# Altium PCB Mini_STM32F405RGT6_V1.0.PcbDoc
Units mil, origin at the board's own origin, x right, y up, seen from the top; angles counter-clockwise.
Board outline 2415 x 1640 mil, 2 copper layers (Top Layer, Bottom Layer); 51 components, 67 nets, 240 pads, 168 vias.
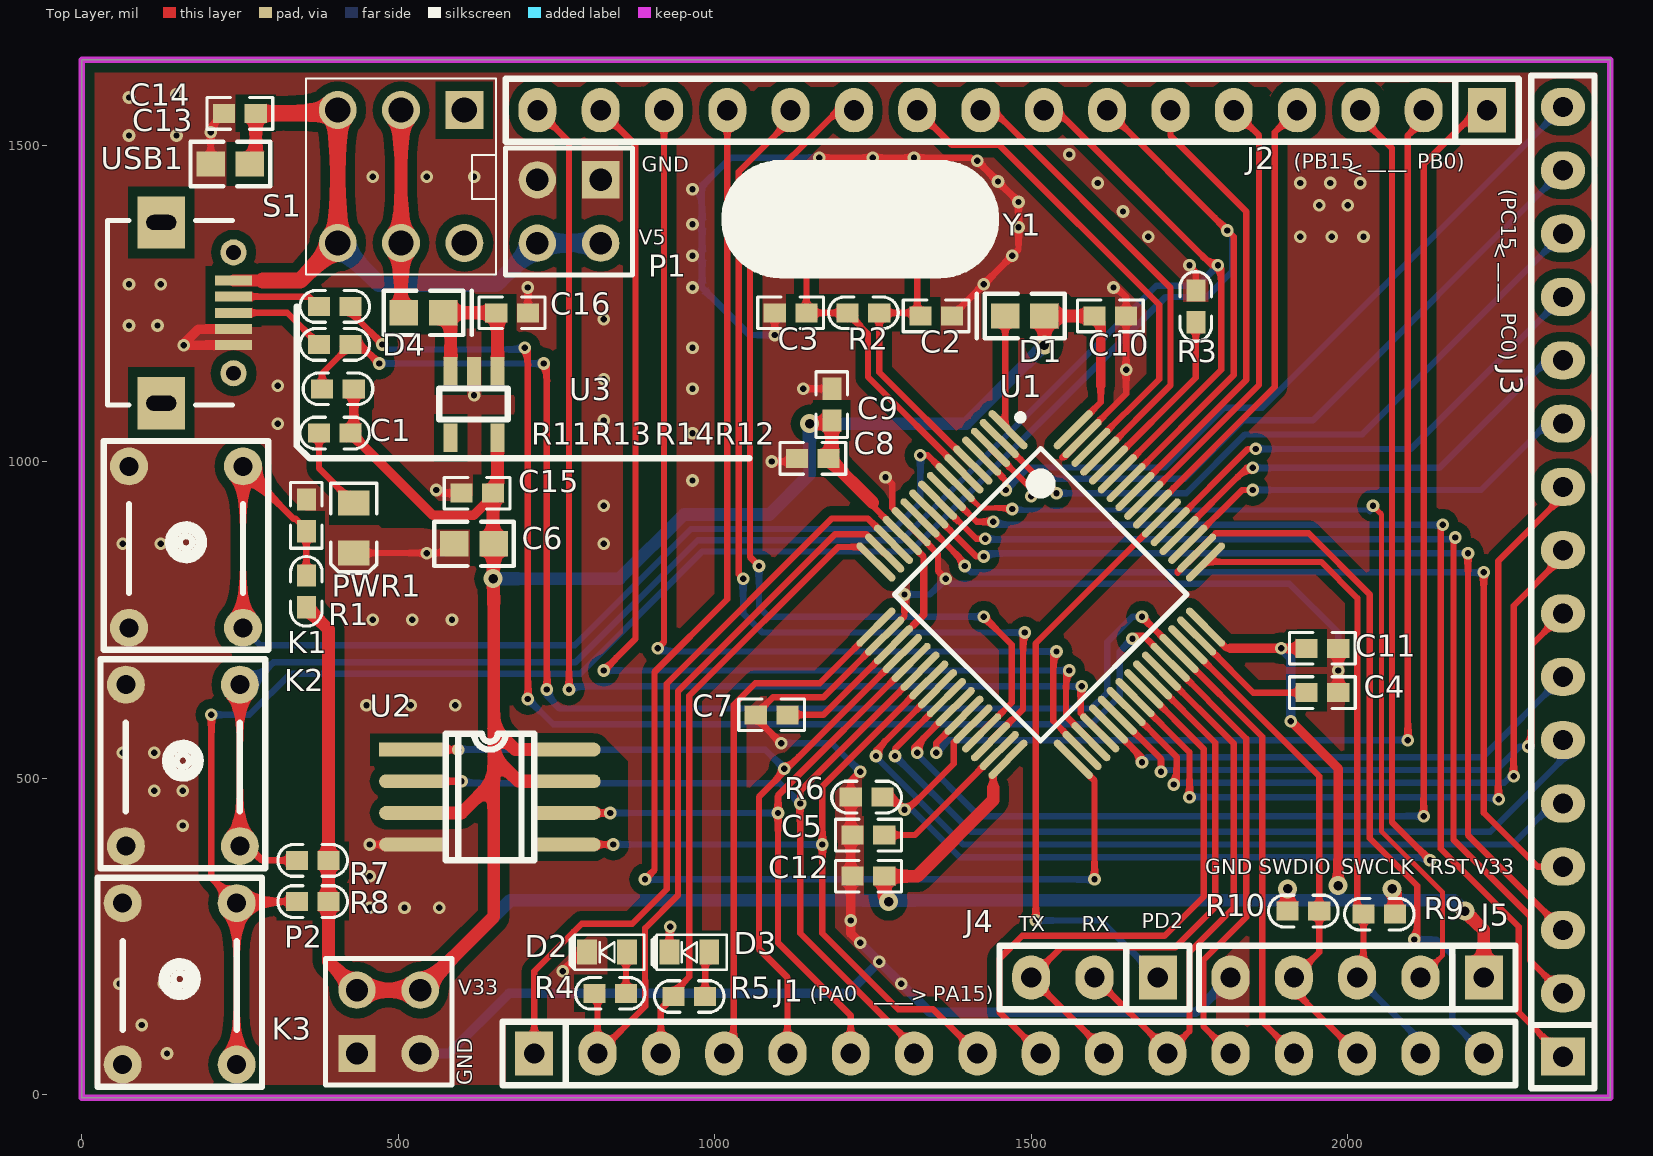
[diagram p0: Top Layer view]
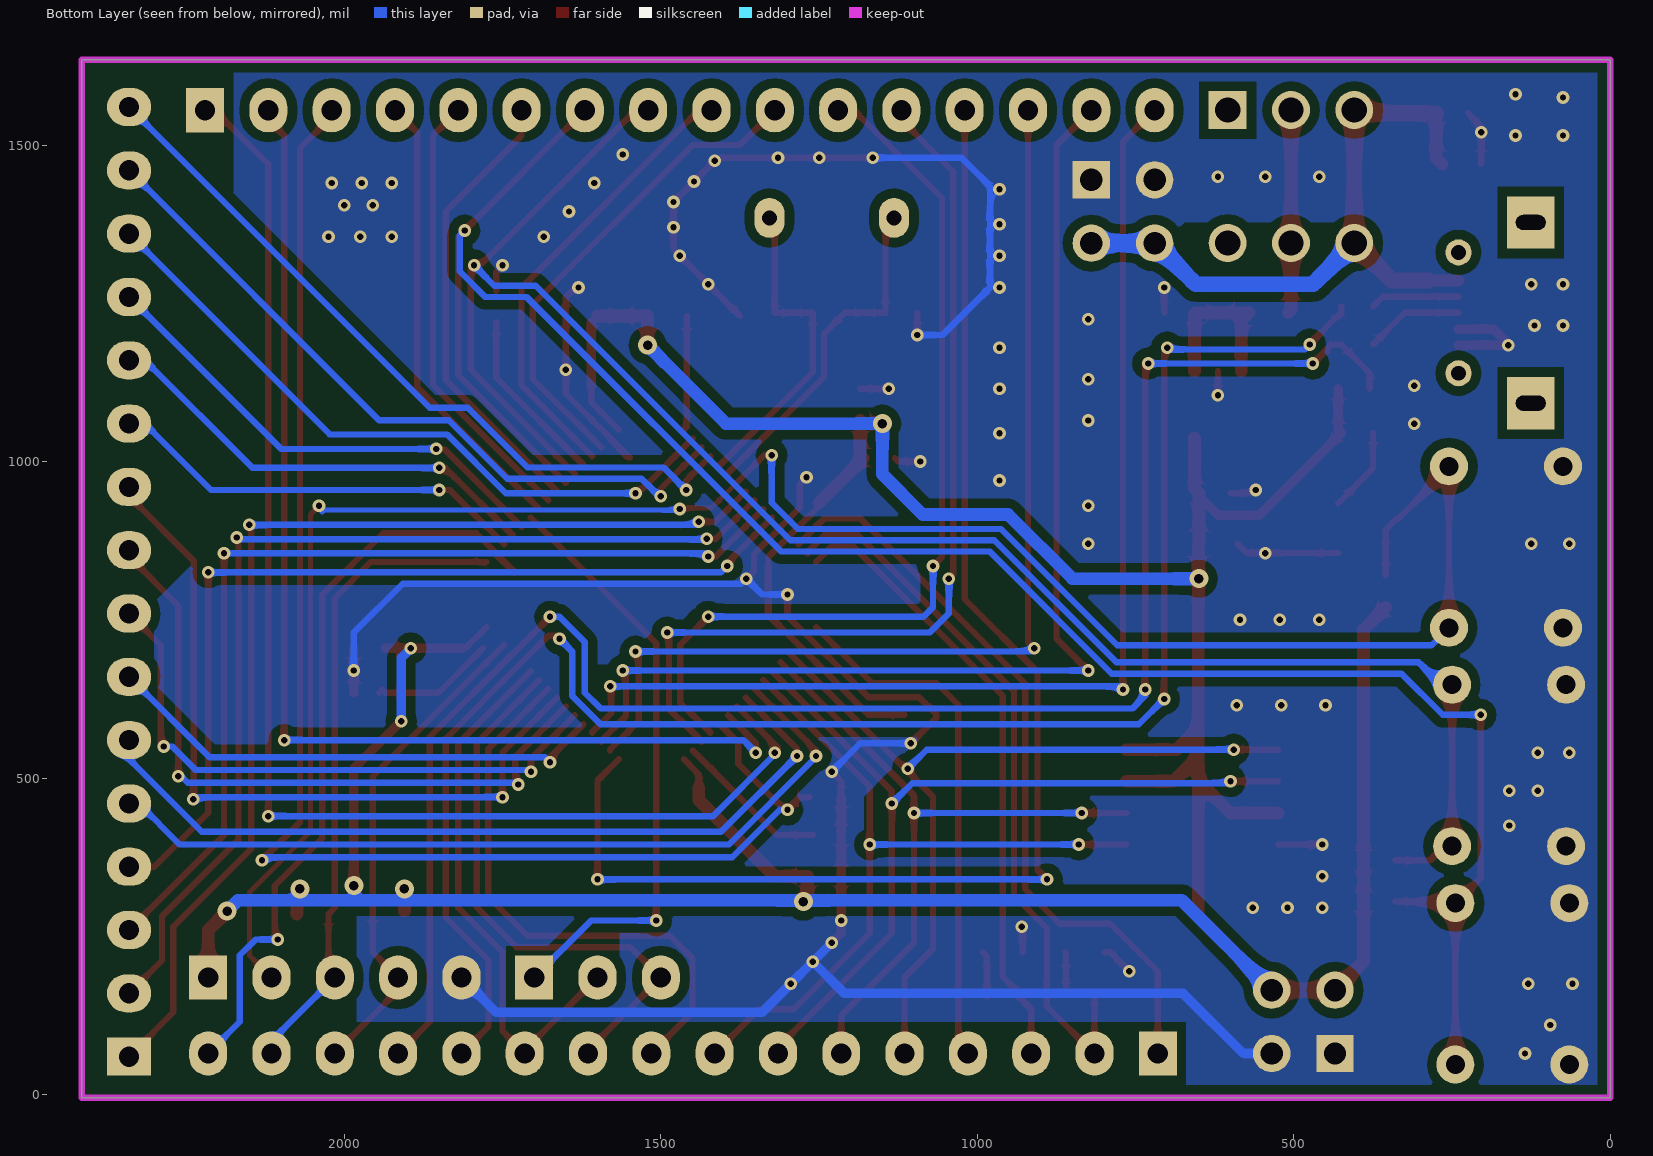
[diagram p1: Bottom Layer view, seen from below]
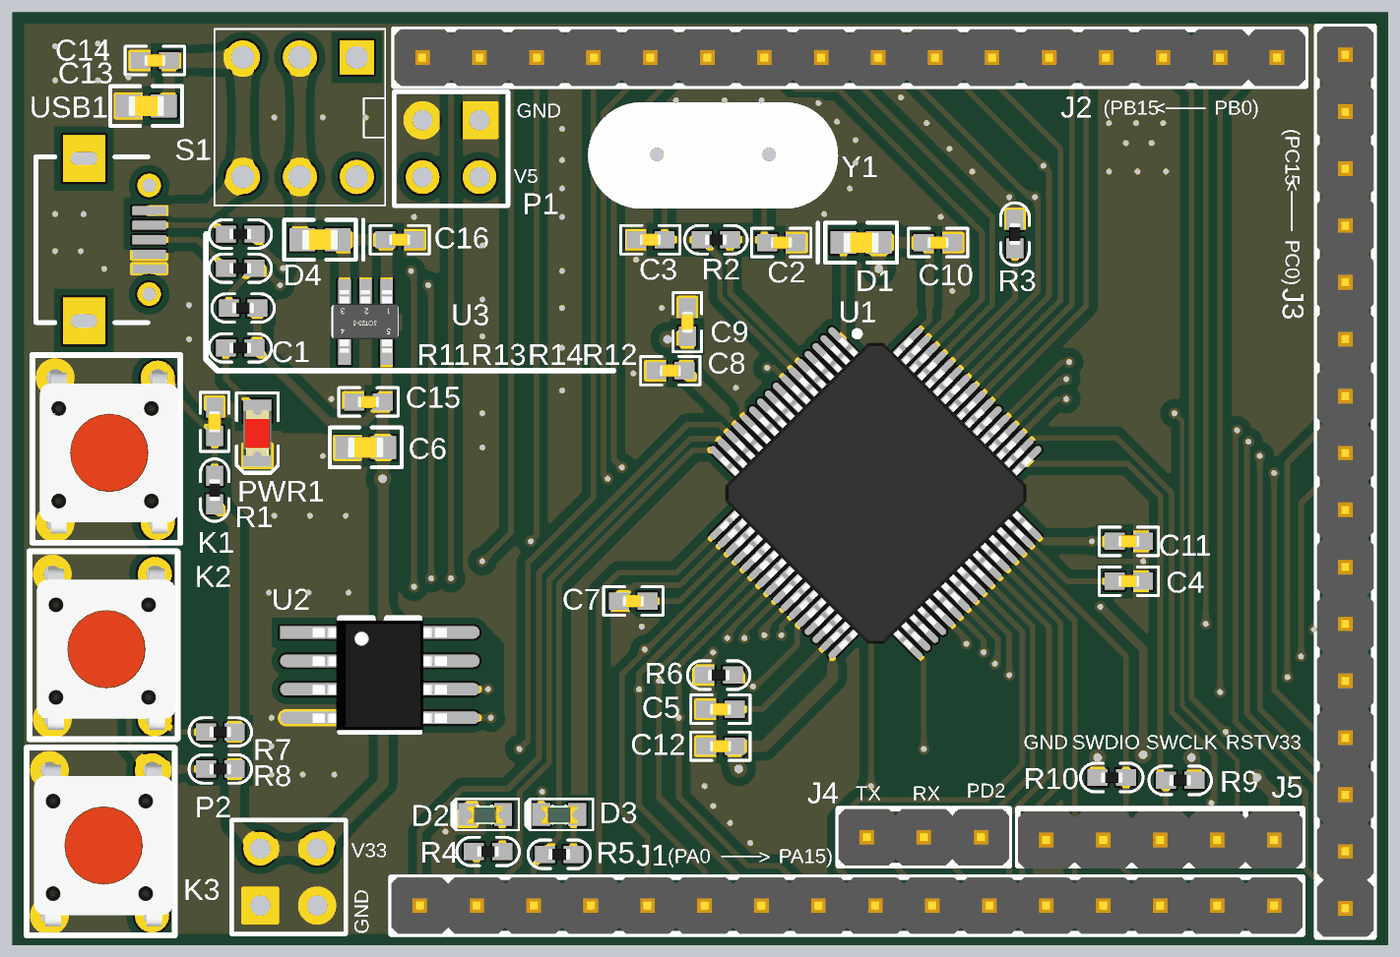
[diagram p2: 3D render of the assembled board from above, using the file's embedded part models]

## Layer stack, top to bottom
Top Layer: signal copper 1.4
Dielectric: dielectric 12.6, FR-4, Dk 4.8
Bottom Layer: signal copper 1.4

## Board outline
0,-5 0,1635 2415,1635 2415,-5

## Design rules (kind name [scope] priority, off if disabled: settings)
Clearance Clearance_1 [InPolygon] p1: gap=15
Clearance [All] p2: gap=7.87
PlaneConnect PlaneConnect_1 [IsPoly] p1: planeconnectstyle=Direct reliefexpansion=20 reliefentries=4 reliefconductorwidth=10 reliefairgap=10
PlaneConnect [All] p2: planeconnectstyle=Relief reliefexpansion=20 reliefentries=4 reliefconductorwidth=10 reliefairgap=10
PolygonConnect [All] p1: connectstyle=Direct reliefconductorwidth=10 reliefentries=4 polygonreliefangle="90 Angle"
RoutingVias [All] p1: holewidth=10 width=20 viastyle="Through Hole" minholewidth=8 minwidth=16 maxholewidth=28 maxwidth=50
SilkToSilkClearance [All] p1 off: silktosilkclearance=10
SilkscreenOverComponentPads SilkToSolderMaskClearance [IsPad] p1 off: minsilkscreentomaskgap=10
SolderMaskExpansion [All] p1: expansion=4
Width [All] p1: maxlimit=50 minlimit=7.87 preferedwidth=10
25 further rules are at their usual default settings.

## Components (designator, comment, footprint, x,y, rotation, side; value= is the part's Value field where it differs from the comment)
C1 "0.1uF" C0402 355,915 r0 top
C2 "18pF" C0402 1350,1230 r270 top
C3 "18pF" C0402 1120,1235 r90 top
C4 "2.2uF" C0402 1960,635 r90 top
C5 "2.2uF" C0402 1243,410 r90 top
C6 "4.7uF" C0603 620,870 r90 top
C7 "1uF" C0402 1090,600 r270 top
C8 "0.1uF" C0402 1155,1005 r270 top
C9 "0.1uF" C0402 1185,1090 r180 top
C10 "0.1uF" C0402 1625,1230 r90 top
C11 "0.1uF" C0402 1960,705 r90 top
C12 "0.1uF" C0402 1243,345 r270 top
C13 "4.7uF" C0603 235,1470 r90 top
C14 "1uF" C0402 250,1550 r270 top
C15 "1uF" C0402 625,950 r270 top
C16 "1uF" C0402 680,1235 r90 top
D1 "RB521" Diode-0603 1490,1230 r270 top
D2 "LED1" LED0603-green 830,225 r180 top
D3 "LED2" LED0603-green 960,225 r180 top
D4 "RB521S-30" Diode-0603 540,1235 r90 top
J1 "CON16" HEADER-16 715,65 r0 top
J2 "CON16" HEADER-16 2220,1555 r180 top
J3 "CON16" HEADER-16 2340,60 r90 top
J4 "CON3" HEADER-3 1600,185 r180 top
J5 "SWD" HEADER-5 2215,185 r180 top
K1 "SW-PB-1" SW-4PIN-DIP 165,865 r0 top
K2 "SW-PB-1" SW-4PIN-DIP 160,520 r0 top
K3 "SW-PB-1" SW-4PIN-DIP 155,175 r0 top
P1 "Header 2X2" HDR2X2 820,1445 r180 top
P2 "Header 2X2" HDR2X2 435,65 r0 top
PWR1 "RED" LED-0805-R 430,895 r270 top
R1 "10K" "R0402 -1" 355,795 r180 top
R2 "1M" "R0402 -1" 1235,1235 r270 top
R3 "10K" "R0402 -1" 1760,1245 r180 top
R4 "510R" "R0402 -1" 835,160 r90 top
R5 "510R" "R0402 -1" 960,155 r90 top
R6 "10K" "R0402 -1" 1240,470 r90 top
R7 "10K" "R0402 -1" 365,370 r90 top
R8 "10K" "R0402 -1" 365,305 r90 top
R9 "10K" "R0402 -1" 2050,285 r90 top
R10 "10K" "R0402 -1" 1930,290 r270 top
R11 "22R" "R0402 -1" 400,1245 r270 top
R12 "510R" "R0402 -1" 400,1045 r90 top
R13 "22R" "R0402 -1" 400,1185 r270 top
R14 "1.5K" "R0402 -1" 405,1115 r90 top
S1 "SWITCH" SWITCH_DDSZ 505,1450 r180 top
U1 "STM32F405RGT6" LQFP-64 1515,790 r315 top locked
U2 "W25Q64" SOIC-AB 645,470 r0 top
U3 "\"TC1185-3.3VCT\"/\"XC6228D332VR\"/\"WL2801E33-5/TR\"/\"SPX5205M5\"" SOT-23-5 620,1090 r270 top
USB1 "Micro usb" MICRO_USB_9 240,1235 r270 top
Y1 "XTAL" XTAL 1230,1385 r90 top

## Footprints (in the part's own frame and the unit in brackets; to place one, negate y for a bottom-side part, rotate by r counter-clockwise, add the part's x,y. Pads: shape width x height; smd on the part's side, far side on the other; paste and mask are expansions set on the pad)
C0402 [mil] "SMT电容"
  rect 30x35 smd: 1(0,-25) 2(0,25)
  silkscreen extent -25,-52 25,52, body extent -11,-20 11,20, height 20
C0603 [mil] "SMT电容"
  rect 40x45 smd: 1(0,31) 2(0,-31)
  silkscreen extent -35,-63 35,63, body extent -18,-32 18,31, height 31
Diode-0603 [mil]
  rect 40x45 smd: 1(0,31) 2(0,-31)
  silkscreen extent -35,-76 35,63, body extent -18,-32 18,31, height 31
HDR2X2 [mm] "Connector; Header; 2x2 Position"
  rect 1.5x1.5 hole 0.9: 1(0,0)
  round 1.5 hole 0.9: 2(0,2.54) 3(2.54,0) 4(2.54,2.54)
  silkscreen extent -1.27,-1.27 3.81,3.81
HEADER-3 [mil]
  rect 60x70 hole 32: 1(-100,0)
  oval 60x70 hole 32: 2(0,0) 3(100,0)
  silkscreen extent -150,-50 150,50, body extent -150,-50 150,50, height 398
HEADER-5 [mil]
  rect 60x70 hole 32: 1(0,0)
  oval 60x70 hole 32: 2(100,0) 3(200,0) 4(300,0) 5(400,0)
  silkscreen extent -50,-50 450,50, body extent -50,-45 450,55, height 398
HEADER-16 [mil]
  rect 60x70 hole 32: 1(0,0)
  oval 60x70 hole 32: 2(100,0) 3(200,0) 4(300,0) 5(400,0) 6(500,0) 7(600,0) 8(700,0) 9(800,0) 10(900,0) 11(1000,0) 12(1100,0) 13(1200,0) 14(1300,0) 15(1400,0) 16(1500,0)
  silkscreen extent -50,-50 1550,50, body extent -50,-50 1550,50, height 398
LED0603-green [mm]
  rect 0.8x1 smd: 1(-0.8,0) 2(0.8,0)
  silkscreen extent -1.5,-0.7 1.5,0.7, body extent -0.8,-0.38 0.8,0.42, height 0.6
LED-0805-R [mm]
  rect 1x1.25 smd: 1(-1,0)
  rect 1x1.25 smd mask+0.102: 2(1,0)
  silkscreen extent -1.8,-0.92 1.8,0.92, body extent -1.01,-0.62 1.01,0.63, height 1.1
LQFP-64 [mm] "LQFP64"
  oval 2.1x0.3 smd: 1(-5.6,3.75) 2(-5.6,3.25) 3(-5.6,2.75) 4(-5.6,2.25) 5(-5.6,1.75) 6(-5.6,1.25) 7(-5.6,0.75) 8(-5.6,0.25) 9(-5.6,-0.25) 10(-5.6,-0.75) 11(-5.6,-1.25) 12(-5.6,-1.75) 13(-5.6,-2.25) 14(-5.6,-2.75) 15(-5.6,-3.25) 16(-5.6,-3.75) 33(5.6,-3.75) 34(5.6,-3.25) 35(5.6,-2.75) 36(5.6,-2.25) 37(5.6,-1.75) 38(5.6,-1.25) 39(5.6,-0.75) 40(5.6,-0.25) 41(5.6,0.25) 42(5.6,0.75) 43(5.6,1.25) 44(5.6,1.75) 45(5.6,2.25) 46(5.6,2.75) 47(5.6,3.25) 48(5.6,3.75)
  oval 0.3x2.1 smd: 17(-3.75,-5.6) 18(-3.25,-5.6) 19(-2.75,-5.6) 20(-2.25,-5.6) 21(-1.75,-5.6) 22(-1.25,-5.6) 23(-0.75,-5.6) 24(-0.25,-5.6) 25(0.25,-5.6) 26(0.75,-5.6) 27(1.25,-5.6) 28(1.75,-5.6) 29(2.25,-5.6) 30(2.75,-5.6) 31(3.25,-5.6) 32(3.75,-5.6) 49(3.75,5.6) 50(3.25,5.6) 51(2.75,5.6) 52(2.25,5.6) 53(1.75,5.6) 54(1.25,5.6) 55(0.75,5.6) 56(0.25,5.6) 57(-0.25,5.6) 58(-0.75,5.6) 59(-1.25,5.6) 60(-1.75,5.6) 61(-2.25,5.6) 62(-2.75,5.6) 63(-3.25,5.6) 64(-3.75,5.6)
  silkscreen extent -5.72,-4.15 4.15,4.57, body extent -9.85,-9.88 9.91,9.88, height 1.6
MICRO_USB_9 [mm]
  rect 0.4x1.5 smd: 1(-1.3,0) 2(-0.65,0) 3(0,0) 4(0.65,0) 5(1.3,0)
  round 1.05 hole 0.6: 6(-2.425,0) 7(2.425,0)
  rect 2.1x1.9 hole 0.6 slot 1.2 at 90 deg: 8(-3.625,-2.9) 9(3.625,-2.9)
  silkscreen extent -3.7,-5.05 3.7,-0.05
"R0402 -1" [mil] "SMT电阻"
  rect 30x35 smd: 1(0,-25) 2(0,25)
  silkscreen extent -25,-55 25,55, body extent -10,-20 10,20, height 15
SOIC-AB [mil]
  rect 110x22 smd: 1(-120,75)
  oval 110x22 smd: 2(-120,25) 3(-120,-25) 4(-120,-75) 5(120,-75) 6(120,-25) 7(120,25) 8(120,75)
  silkscreen extent -70,-100 70,100, body extent -118,-97 118,96, height 61
SOT-23-5 [mil]
  rect 45x22 smd: 1(-52.5,37) 2(-52.5,0) 3(-52.5,-37) 4(52.5,-37) 5(52.5,37)
  silkscreen extent -26,-55 24,53, body extent -57,-57 54,57, height 43
SW-4PIN-DIP [mil]
  round 60 hole 30: 1(-90,-127.5) 1(-90,127.5) 2(90,-127.5) 2(90,127.5)
  silkscreen extent -130,-162 130,168, body extent -117,-160 127,151, height 191
SWITCH_DDSZ [mil] "SWITCH_DDSZ"
  rect 60x60 hole 40: 1(-99.65,-105.34)
  round 60 hole 40: 2(0.35,-105.34) 3(100.35,-105.34) 4(100.35,104.66) 5(0.35,104.66) 6(-99.65,104.66)
  silkscreen extent -150,-155 150,155
XTAL [mm] "10*4.5----5"
  oval 1.6x1.2 hole 0.6: 1(0,2.5) 2(0,-2.5)
  silkscreen extent -2.3,-5.46 2.2,5.46, body extent -2.3,-5.5 2.17,5.47, height 2.35

## Part data
C1 C2 C3 C4 C5 C6 C7 C8 C9 C10 C11 C12 C13: library part CAP, "SMT电容"
C14 C15 C16: library part 电容
D1: library part DIODE
D2 D3: library part LED0, "Typical INFRARED GaAs LED"
D4: library part "Diode 1N914", "二极管"
J1 J2 J3 J4: "Connector"
J5: library part CON5, "Connector"
K1 K2 K3: "轻触按键"
P1 P2: "Header, 2-Pin, Dual row"
PWR1: library part LED1
R1 R2 R3 R4 R5 R6 R7 R8 R9 R10 R11 R12 R13 R14: library part RES1, "SMT电阻"
U2: library part W25X40, "nor flash"
U3: library part S1132, "LDO"
USB1: library part "USB joggle"
Y1: "Crystal Oscillator"

## Via types
v1: diameter 20, hole 10, Top Layer to Bottom Layer, tented both sides, 160 vias
v2: diameter 30, hole 15, Top Layer to Bottom Layer, tented both sides, 8 vias

## Nets (pads, with @x,y where several pads share a name; then routed paths per layer and width w, separated by ;. In a path a pad name is that pad's centre, name@x,y a point inside that pad or via, vN(x,y) a via of type N, cw(c..) or ccw(c..) an arc to the next point about the centre after c; other vN are vias at no path point)
4: USB1.6
GND: C1.2 C2.2 C3.2 C4.1 C5.2 C6.1 C7.1 C8.1 C9.1 C10.1 C11.1 C12.1 C13.1 C14.1 C15.1 C16.1 D2.2 D3.2 J5.5 K1.1 K2.1 K3.1 P1.1 P1.3 P2.1 P2.3 PWR1.2 R3.1 R6.2 U1.12 U1.18 U1.63 U2.4 U3.2 USB1.4 USB1.5 | length 5634.6
  Top Layer w10: C13.1 204,1529 C14.1 ; PWR1.2 574.63,855.63 C6.1 ; v1(455,395) U2.4 ; v1(560,955) 565,950 C15.1 ; v1(620,1105) U3.2 ; C16.1 v1(705,1275) ; v1(760,195) 790,225 D2.2 ; D3.2 928.5,263.5 v1(930,265) ; v1(1090,1000) 1125,1000 C8.1 ; v1(1095,1200) C3.2 ; v1(1105,555) 1065,595 C7.1 1065,600.71 1092.17,627.87 1171.92,627.87 U1.18 1300,755.95 v1(1300,790) ; v1(1140,1115) C9.1 ; v1(1165,1480) 1405,1480 1410,1475 v1(1415,1475) v1(1480,1410) 1480,1335 C2.2 ; R6.2 1215,495 v1(1230,510) ; v1(1270,975) 1280.47,964.53 1280.47,927.09 U1.12 1310.38,895.9 1352.87,853.41 1352.87,827.13 v1(1365,815) ; U1.63 1580.42,1035.09 1551.79,1006.46 1549.23,1006.46 1650,1107.23 C10.1 1650,1260 1635,1275 v1(1630,1275) ; v1(1750,1310) 1760,1300 R3.1
  Top Layer w15: USB1.5 v1(161.18,1183.82) 160,1185 184.41,1209.41 USB1.4 ; R6.2 1215,255 v1(1230,240) ; C4.1 v1(1985,670) C11.1
  Bottom Layer w10: v1(1095,1200) 1055,1200 980,1275 980,1435 1025,1480 v1(1165,1480) ; v1(1105,555) 1185,555 v1(1230,510) ; v1(1300,790) 1340,790 v1(1365,815) 1372.87,807.13 1907.87,807.13 1985,730 v1(1985,670)
  Bottom Layer w15: P2.3 580,65 675,160 1210,160 v1(1260,210) ; v1(1230,240) v1(1260,210) ; J5.5 1760,130 1340,130 v1(1295,175) v1(1260,210)
  other v1: 135,65 95,110 60,175 130,175 1215,275 455,295 510,295 565,295 455,345 160,425 115,480 160,480 65,540 115,540 450,615 520,615 590,615 460,750 522.5,750 585,750 545,855 65,870 125,870 825,870 825,930 965,970 965,1045 310,1060 825,1065 965,1115 310,1120 825,1130 1650,1145 965,1180 75,1215 120,1215 825,1225 965,1275 75,1280 125,1280 1425,1280 965,1325 1470,1325 1685,1355 1925,1355 1975,1355 2025,1355 1480,1370 965,1375 1645,1395 1955,1405 2000,1405 965,1430 1605,1440 1925,1440 1972.5,1440 2020,1440 1447.5,1442.5 460,1450 545,1450 620,1450 1250,1480 1315,1480 1560,1485 75,1515 150,1515 204,1520 75,1575 150,1580
KEY1: J2.8 K2.2 R7.2 U1.59 | length 2979.7
  Top Layer w10: K2.2@250,392.5 K2.2@250,405 ; K2.2@250,647.5 K2.2@250,405 ; R7.2 285,370 K2.2@250,405 ; J2.8 1540,1555 1785,1310 v1(1795,1310) 1800.37,1304.63 1800.37,1144.97 U1.59
  Bottom Layer w10: K2.2@250,647.5 267.5,630 267.5,647.5 302.87,682.87 780.25,682.87 973.12,875.75 1295.75,875.75 1697.87,1277.87 1762.87,1277.87 v1(1795,1310)
KEY2: J2.7 K3.2 R8.2 U1.58 | length 3377.4
  Top Layer w10: v1(205,600) 205,342.5 K3.2@245,302.5 ; K3.2@245,47.5 K3.2@245,302.5 ; R8.2 247.5,305 K3.2@245,302.5 ; J2.7 v1(1810,1365) 1820,1355 1820,1136.76 U1.58
  Bottom Layer w10: v1(205,600) 265,600 330,665 787.65,665 980.53,857.87 1310,857.87 1712.13,1260 1777.35,1260 1817.87,1300.53 1817.87,1357.13 v1(1810,1365)
LED1: J1.2 R4.2 U1.15 | length 1165.8
  Top Layer w10: R4.2 815,155 J1.2 815.71,65 890.37,139.67 890.37,180.33 890.12,180.59 890.12,262.99 942.13,315 942.13,637.4 1190.06,885.34 1239.99,885.34 1267.35,857.98 1267.35,855.42 U1.15
LED2: J1.3 R5.2 U1.16 | length 985.4
  Top Layer w10: J1.3 915,135 R5.2 935,161.08 960,186.08 960,630 1195,865 1231.21,865 U1.16
NetC2_1: C2.1 R2.2 U1.5 Y1.2 | length 514.6
  Top Layer w10: Y1.2 1320,1376.57 1320,1235 R2.2 1260,1141.16 U1.5@1406.54,994.62
NetC3_1: C3.1 R2.1 U1.6 Y1.1 | length 551
  Top Layer w10: Y1.1 1145,1371.57 C3.1 R2.1 1210,1234.29 1242.13,1202.17 1242.13,1133.75 1393.9,981.98 U1.6
NetC4_2: C4.2 U1.47 | length 190.1
  Top Layer w10: U1.47@1780.95,705 1850.95,635 C4.2 ; C4.2@1940,640 C4.2@1945,635
NetC5_1: C5.1 U1.31 | length 244.9
  Top Layer w10: C5.1@1260,410 1315.95,410 U1.31
NetC16_2: C16.2 D4.2 U3.1 U3.3 | length 274.8
  Top Layer w20: U3.3 583,1223 D4.2 C16.2 657,1233 U3.1
NetD1_2: D1.2 U1.1 | length 181.6
  Top Layer w10: D1.2 1459,1054.79 U1.1
NetD2_1: D2.1 R4.1 | length 65.6
  Top Layer w10: R4.1 860,223.5 D2.1
NetD3_1: D3.1 R5.1 | length 72.7
  Top Layer w10: R5.1 985,218.5 D3.1
NetD4_1: D4.1 S1.2 S1.5 | length 322.1
  Top Layer w20: S1.2 S1.5 504.65,1239.35 D4.1
NetPWR1_1: PWR1.1 R12.2 | length 133.4
  Top Layer w10: R12.2 375,989.37 PWR1.1
NetR3_2: R3.2 U1.60 | length 282.5
  Top Layer w10: U1.60 1760,1132.44 R3.2
NetR11_1: R11.1 USB1.2 | length 141.5
  Top Layer w10: USB1.2 359.41,1260.59 R11.1
NetR13_1: R13.1 USB1.3 | length 155.7
  Top Layer w10: USB1.3 325,1235 R13.1
PA0: J1.1 U1.14 | length 1201
  Top Layer w10: J1.1 715,195.14 777.42,257.56 777.56,257.56 790,270 870,270 924.25,324.25 924.25,649.25 1185,910 1241.89,910 U1.14
PA3: J1.4 U1.17 | length 832.5
  Top Layer w10: J1.4 1030,80 1030,615.71 1064.29,650 1166.21,650 U1.17
PA4: J1.5 U1.20 U2.1 | length 1341.6
  Top Layer w10: U2.1 v1(595,545) ; J1.5 1115,185 1070,230 1070,470.27 U1.20
  Bottom Layer w10: v1(595,545) 1080,545 v1(1110,515)
PA5: J1.6 U1.21 U2.6 | length 1087.6
  Top Layer w10: U2.6 v1(835,445) ; J1.6 1215,125 1100,240 1100,472.44 U1.21
  Bottom Layer w10: v1(835,445) v1(1100,445)
PA6: J1.7 U1.22 U2.2 | length 1368.1
  Top Layer w10: U2.2 v1(600,495) ; J1.7@1315,80 1310,80 1135,255 1135,479.6 U1.22
  Bottom Layer w10: v1@600,492.13 1102.87,492.13 v1(1135,460)
PA7: J1.8 U1.23 U2.5 | length 1198.4
  Top Layer w10: U2.5 v1(840,395) ; U1.23 1170,486.76 1170,255 1290,135 1345,135 J1.8
  Bottom Layer w10: v1(840,395) v1(1170,395)
PA8: J1.9 U1.41 | length 907.9
  Top Layer w10: J1.9 1450,130 1450,215 1485.75,250.75 1710.75,250.75 1772.87,312.87 1772.87,546.05 U1.41
PA9: J1.10 J4.3 U1.42 | length 909.5
  Top Layer w10: J1.10 1615,70 J4.3 1547.87,232.87 1727.87,232.87 1790.75,295.75 1790.75,556.01 U1.42
  Bottom Layer w10: J4.3@1500,180 J4.3
PA10: J1.11 J4.2 U1.43 | length 867.4
  Top Layer w10: J4.2 1715,70 J1.11 1750,100 1750,225 1820,295 1820,554.6 U1.43
  Bottom Layer w10: J1.11 J1.11@1715,70
PA11: J1.12 R11.2 U1.44 | length 2727.8
  Top Layer w10: R11.2 425,1235 425.71,1235 475,1185.71 v1(475,1185) ; v1(700,1180) 705,1175 v1(705,625) ; v1(1660,720) 1665,725 1677.44,725 U1.44 1840,562.44 1840,280 1772.13,212.13 1772.13,107.87 J1.12
  Bottom Layer w10: v1(475,1185) 482.87,1177.13 v1@700,1177.13 ; v1(705,625) 745,585 1595.28,585 1640,629.72 1640,700 v1(1660,720)
PA12: J1.13 R13.2 R14.2 U1.45 | length 2777.9
  Top Layer w10: R14.2 380,1139.29 425,1184.29 R13.2 440,1185 v1(470,1155) ; v1(730,1155) 735,1150 v1(735,640) ; v1(1675,755) 1733.26,696.74 U1.45 1865,565.27 1865,115 J1.13
  Bottom Layer w10: v1(470,1155) v1(730,1155) ; v1(735,640) 735,630 755,610 1595,610 1620,635 1620,715 1660,755 v1(1675,755)
PA13: J1.14 J5.4 R10.2 U1.46 | length 789.6
  Top Layer w10: U1.46 1955,503.11 R10.2 1955,225 J5.4 1915,165 J1.14
PA14: J1.15 J5.3 R9.2 U1.49 | length 1053.3
  Top Layer w10: U1.49 1958.22,841.5 2015.37,784.35 2015.37,684.67 2015,684.29 2015,655.71 2015.37,655.33 2015.37,614.67 2015,614.29 2015,295 R9.2 2025,195 J5.3 ; J1.15 J1.15@2115,85
  Bottom Layer w10: J5.3 2115,85 J1.15
PA15: J1.16 U1.50 | length 1238.4
  Top Layer w10: U1.50 1762.65,855.42 1731.46,824.23 1731.46,826.79 1791.29,886.62 1938.38,886.62 2035,790 2035,405 2110,330 v1@2110,245
  Bottom Layer w10: v1(2105,245) 2140,245 2165,220 2165,115 J1.16
PB0: J2.1 U1.26 | length 2108.1
  Top Layer w10: v1@1315,545 1315,548.24 U1.26 ; v1(2120,440) 2120,1470 2205,1555 J2.1
  Bottom Layer w10: v1(1320,540) 1320,537.65 1417.65,440 v1(2120,440) v1@2125,440
PB1: J2.2 U1.27 | length 1836.1
  Top Layer w10: v1(1350,540) 1350,555.4 U1.27 ; v1(2095,560) 2095,567.13 2095,1515 2120,1540 J2.2
  Bottom Layer w10: v1(1350,540) 1370,560 v1(2095,560)
PB2: J2.3 R6.1 U1.28 | length 2371.9
  Top Layer w10: R6.1 1280,470 v1(1300,450) 1305,450 1377.91,522.91 1377.91,555.47 ; J2.3@2014.25,1549.25 J2.3 2020,1545 2070,1495 2070,430 v1(2130,370) ; 1377.91,555.47 1377.91,556.75 1405.26,584.1 U1.28@1406.54,584.1 ; 1377.91,555.47 U1.28@1406.54,584.1 ; U1.28@1406.54,584.1 U1.28 1407.82,584.1 U1.28@1406.54,584.1
  Bottom Layer w10: v1(1300,450) 1312.37,450 1387.37,375 2125,375 v1(2130,370)
PB3: J2.4 U1.55 | length 724.5
  Top Layer w10: U1.55 1885,1118.24 1885,1520 J2.4
PB4: J2.5 U1.56 | length 708.1
  Top Layer w10: U1.56 1860,1121.08 1860,1515 J2.5
PB5: J2.6 U1.57 | length 724.8
  Top Layer w10: U1.57 1840,1128.92 1840,1395 1720,1515 J2.6
PB8: J2.9 U1.61 | length 728.7
  Top Layer w10: J2.9 1440,1555 1720,1275 1720,1120.27 U1.61
PB9: J2.10 U1.62 | length 779.2
  Top Layer w10: J2.10 1375,1500 1449.72,1500 1702.13,1247.6 1702.13,1130.24 U1.62
PB10: J2.11 U1.29 | length 1499.9
  Top Layer w10: v1(1070,835) 1055.75,849.25 1055.75,1415.75 1195,1555 J2.11 ; v1(1425,755) 1469.25,710.75 1469.25,618.98 U1.29 1421.74,572.75 1451.65,602.66
  Bottom Layer w10: v1(1070,835) 1070,770 1085,755 v1(1425,755)
PB11: J2.12 U1.30 | length 1533.5
  Top Layer w10: v1(1045,815) 1037.87,822.13 1037.87,1457.87 1120,1540 J2.12 ; 1469.53,592.7 1435.66,558.83 U1.30 1487.13,609.01 1487.13,727.13 v1(1490,730)
  Bottom Layer w10: v1(1045,815) 1045,760 1075,730 v1(1490,730)
PB12: J2.13 U1.33 | length 2182.4
  Top Layer w10: v1(890,340) 905,355 905,667.65 1020,782.65 J2.13 ; U1.33 1600,496.21 v1(1600,340)
  Bottom Layer w10: v1(890,340) v1(1600,340)
PB13: J2.14 U1.34 | length 1649.3
  Top Layer w10: v1(910,705) 920,715 J2.14 ; v1@1535,695 1535,590.33 1580.42,544.91 U1.34
  Bottom Layer w10: v1@915,700 v1(1540,700)
PB14: J2.15 U1.35 | length 1794.3
  Top Layer w10: J2.15 875,1500 875,720 v1(825,670) ; v1(1560,670) 1555,665 1555,598.17 1594.34,558.83 U1.35
  Bottom Layer w10: v1(825,670) v1(1560,670)
PB15: J2.16 U1.36 | length 1831.6
  Top Layer w10: J2.16 770,1505 v1(770,640) ; v1@1578.35,645 1578.35,602.66 1608.26,572.75 U1.36
  Bottom Layer w10: v1@770,645 v1(1580,645)
PC0: J3.1 U1.8 | length 1726.9
  Top Layer w10: U1.8 1413.92,905 v1(1440,905) ; v1(2150,900) 2147.13,897.13 2147.13,388.15 2270,265.28 2270,130 J3.1
  Bottom Layer w10: v1(1440,905) 1445,900 v1(2150,900)
PC1: J3.2 U1.9 | length 1637.4
  Top Layer w10: U1.9 1413.21,877.87 v1(1427.71,877.87) ; v1(2170,880) 2167.13,877.13 2167.13,402.87 2287.87,282.13 2287.87,212.13 J3.2
  Bottom Layer w10: v1(1427.71,877.87) 1428.45,877.13 2167.13,877.13 v1(2170,880)
PC2: J3.3 U1.10 | length 1542.1
  Top Layer w10: U1.10 1413.24,850 v1(1425,850) ; v1(2190,855) 2190,410 J3.3
  Bottom Layer w10: v1(1425,850) 1430,855 v1(2190,855)
PC3: J3.4 U1.11 | length 1469.7
  Top Layer w10: U1.11 1395,840.4 v1(1395,835) ; v1(2215,825) 2215,445 2300,360 J3.4
  Bottom Layer w10: v1(1395,835) 1405,825 v1(2215,825)
PC4: J3.5 U1.24 | length 1317.6
  Top Layer w10: v1(1255,535) 1255,543.92 U1.24
  Bottom Layer w10: v1(1255,535) 1255,532.65 1392.65,395 2260,395 2325,460 J3.5
PC5: J3.6 U1.25 | length 1308.1
  Top Layer w10: v1(1285,535) 1285,546.08 U1.25
  Bottom Layer w10: v1(1285,535) 1405,415 2225,415 2340,530 J3.6
PC6: J3.7 U1.37 | length 803.2
  Top Layer w10: U1.37 1675,532.56 v1(1675,525)
  Bottom Layer w10: v1(1675,525) 1682.87,532.87 2212.87,532.87 J3.7
PC7: J3.8 U1.38 | length 950.3
  Top Layer w10: U1.38 1705,530.4 v1(1705,510) ; v1(2285,550) 2290,550 2290,710 J3.8
  Bottom Layer w10: v1(1705,510) 1707.87,512.87 2235,512.87 2237.13,515 2237.13,515.22 2271.9,550 v1(2285,550)
PC8: J3.9 U1.39 | length 1092
  Top Layer w10: U1.39 1730,533.24 1730,495 v1(1725,490) ; v1(2262.13,502.87) 2262.13,772.13 2340,850 J3.9
  Bottom Layer w10: v1(1725,490) 1727.87,492.87 2247.13,492.87 2259.25,505 2261.38,502.87 v1(2262.13,502.87)
PC9: J3.10 U1.40 | length 1219.6
  Top Layer w10: U1.40 1750,541.08 v1(1750,470) ; v1(2238.56,466.44) 2237.13,467.87 2237.87,468.62 2237.87,842.87 2340,945 J3.10
  Bottom Layer w10: v1(1750,470) 2235,470 v1(2238.56,466.44)
PC10: J3.11 U1.51 | length 671.5
  Top Layer w10: U1.51 1833.11,955 v1(1850,955)
  Bottom Layer w10: v1(1850,955) 2210,955 2315,1060 J3.11
PC11: J3.12 U1.52 | length 721.1
  Top Layer w10: U1.52 1840.27,990 v1(1850,990)
  Bottom Layer w10: v1(1850,990) 2145,990 2315,1160 J3.12
PC12: J3.13 U1.53 | length 795.7
  Top Layer w10: U1.53 1842.44,1020 v1(1855,1020) ; J3.13@2340,1235 J3.13
  Bottom Layer w10: v1(1855,1020) 2100,1020 J3.13
PC13: J3.14 U1.2 | length 1096
  Top Layer w10: U1.2 1535.95,950 v1(1540,950)
  Bottom Layer w10: v1(1540,950) 1745,950 1837.87,1042.87 2022.87,1042.87 J3.14
PC14: J3.15 U1.3 | length 1157.4
  Top Layer w10: U1.3 1435.66,1021.17 1500,956.83 v1(1500,945)
  Bottom Layer w10: v1(1500,945) 1502.65,945 1530.53,972.87 1742.6,972.87 1834.86,1065.14 1945.14,1065.14 J3.15
PC15: J3.16 U1.4 | length 1200
  Top Layer w10: U1.4 1421.74,1008.26 1460,970 v1(1460,955)
  Bottom Layer w10: v1(1460,955) 1495.75,990.75 1710.75,990.75 1805,1085 1865,1085 J3.16
PD2: J4.1 U1.54 | length 948.2
  Top Layer w10: v1(1507.33,275) 1507.33,712.74 U1.54
  Bottom Layer w10: v1(1507.33,275) 1610,275 J4.1
RESET: C1.1 J5.2 K1.2 R1.1 U1.7 | length 3277.1
  Top Layer w7.87: U1.7 1419.95,926.81 1468.19,926.81 v1(1470,925) ; v1(2040,930) 2053.19,916.81 2053.19,415.97 2149.15,320 2150,320 2150,220 J5.2
  Top Layer w10: K1.2@255,737.5 K1.2@255,989.29 ; K1.2@255,992.5 K1.2@255,989.29 ; R1.1 C1.1 355,892.5 337.87,909.63 334.67,909.63 K1.2@255,989.29 ; v1(1325,1010) 1336.76,1010 U1.7
  Bottom Layer w7.87: v1(1470,925) 1471.81,923.19 2031.81,923.19 2035,920 v1@2040,925
  Bottom Layer w10: K1.2@255,737.5 282.5,710 779.25,710 962.87,893.62 1283.62,893.62 1325,935 v1(1325,1010)
V33: C6.2 C7.2 C8.2 C9.2 C10.2 C11.2 C12.2 C15.2 D1.1 J5.1 P2.2 P2.4 R1.2 R7.1 R8.1 R9.1 R10.1 R12.1 R14.1 U1.13 U1.19 U1.32 U1.48 U1.64 U2.3 U2.7 U2.8 U3.5 | length 7423.3
  Top Layer w10: C7.2 1171.89,600 U1.19 1313.46,741.57 ; 1247.36,932.36 U1.13 1330,849.73 1330,835 ; 1440,485 1440,506.21 U1.32 ; U1.64 1610,1093.79 1610,1120 ; C10.2 C10.2@1610,1220 ; U1.48 1808.79,705 1814.4,705 ; v2(2070,325) v2@2075,320
  Top Layer w12: 1313.46,741.57 1330,758.11 1330,835
  Top Layer w15: R14.1 430,1050 R12.1 555,915 619.24,915 650,945.76 C15.2 ; 1610,1120 C10.2@1610,1220 ; 1814.4,705 v1(1895,705) C11.2 ; v1(1910,590) 1985,515 v2(1985,330)
  Top Layer w20: R1.2 390,735 R7.1 R8.1 390,210 P2.2 P2.4 651,281 651,496 ; U2.3 600,445 651,496 ; C15.2@650,945.76 650,871 C6.2 651,579 ; C15.2 657,957 U3.5 ; U2.7 690,495 651,534 ; U2.8 685,545 651,579 ; v2(1150,1060) 1180,1060 C9.2 1185,1010 C8.2 1250,935 ; v2(1275,305) 1268,312 C12.2 1320,345 1440,465 1440,485 ; v2(1521,1184) D1.1 C10.2 ; R10.1 v2(1905,325) ; R9.1 v2@2075,320 ; v2(2185,290) 2215,260 J5.1 ; 651,496 651,534 ; 651,534 651,579
  Bottom Layer w10: v2(1905,325) 1905,312.13 1910,307.13 ; 1922.87,307.13 1925,307.13 ; v2(2070,325) 2087.87,307.13 2090,307.13
  Bottom Layer w15: v1(1895,705) 1910,690 v1(1910,590)
  Bottom Layer w20: P2.4 677.13,307.13 1910,307.13 1922.87,307.13 ; v2(650,815) 850,815 951.5,916.5 1086.5,916.5 1150,980 v2(1150,1060) 1397,1060 v2(1521,1184) ; 1925,307.13 1975,307.13 ; v2(1985,330) 1985,317.13 1975,307.13 ; 2087.87,307.13 1975,307.13 ; 2090,307.13 2167.87,307.13 v2(2185,290)
VBUS: C13.2 C14.2 P1.2 P1.4 S1.3 S1.4 USB1.1 | length 1084.1
  Top Layer w19: USB1.1 286.18,1286.18
  Top Layer w20: C13.2 275,1479 C14.2 ; S1.3@399.31,1550 S1.3
  Top Layer w25: C14.2 S1.3@399.31,1550 ; 286.18,1286.18 345.49,1286.18 S1.4 S1.3
  Bottom Layer w25: S1.4 469.98,1280 655,1280 P1.4 P1.2
pads on no net: S1.1 S1.6 U3.4 USB1.7 USB1.8 USB1.9

## Polygon pours and split planes (outlines as drawn)
GND on Bottom Layer "Bottom Layer-No Net" (solid, remove dead copper, pour order 22): -5,1630 2415,1630 2415,0 2410,-5 2395,10 0,10 0,1635
GND on Top Layer "GND" (solid, remove dead copper, pour order 24): 0,1635 2405,1635 2415,1625 2415,-5 5,-5 0,0 0,1635

## Keep-outs
Keep-Out Layer:
  the board outline again, w10

## Other copper
Top Layer:
  pour cut-out: 370,860 382.5,860 385,857.5 385,852.5 375.39,852.5 375.39,857.5
  pour cut-out: 469.61,961.42 469.61,899.69 474.29,895 542.56,895 474.23,963.33 472.31,961.42
  pour cut-out: 1235.5,381.6 1276.97,381.6 1280.78,377.78 1280.78,375 1235.5,375
  pour cut-out: 1236.98,516.98 1238.4,518.4 1332.97,518.4 1336.86,514.51 1305.71,483.36 1305.71,479.64 1300.66,479.64 1297.5,482.8 1297.5,500 1240,500 1236.98,503.02
  pour cut-out: 1558.5,1265 1558.5,1255.54 1567.44,1255.54 1567.5,1255.49 1567.5,1260 1563.5,1260
  pour cut-out: 752.09,1592.09 882.91,1592.09 890,1585 885,1580 885,1520 783.84,1520 752.09,1551.74
  pour cut-out: 1068.71,1592.09 1187.91,1592.09 1187.91,1567.91 1115.76,1495.76 1040.39,1495.76 1040.39,1563.78
  pour cut-out: 1352.09,1592.09 1871.29,1592.09 1880.69,1582.69 1839.61,1541.61 1839.61,1430.76 1833.08,1430.76 1709.61,1554.23 1409.23,1554.23 1375,1520 1350,1545 1350,1590
  pour cut-out: 1292.5,1265 1299.61,1265 1299.61,1260 1292.5,1260
  pour cut-out: 760,115 794.61,115 794.61,15.39 760,15.39
  pour cut-out: 831.71,558.11 863.55,526.27 863.55,404.75 835.25,404.75 825,415 831.71,421.71
  pour cut-out: 670,475 710,475 710,374.4 704.37,368.78 676.49,368.78 676.49,468.51
  pour cut-out: 595,571 625,571 625.51,570.49 624.76,569.74 624.76,511.94 617.36,511.94 595,534.29
  pour cut-out: 445,1275 446.33,1273.67 478.72,1273.67 478.72,1231.8 469.97,1223.05 444.73,1223.05 444.73,1274.73
  pour cut-out: 622.5,1260.54 608.5,1260.54 608.5,1270 617.5,1270 622.5,1265
  pour cut-out: 2052.09,1592.09 2059.31,1599.31 2175,1599.31 2175,1554.02 2143.43,1522.46 2071.38,1522.46 2071.38,1572.81
  pour cut-out: 342.5,1062.5 361.19,1043.81 458.81,1043.81 458.81,1081.31 462.5,1085 382.53,1164.97 342.5,1164.97
Bottom Layer:
  pour cut-out: 2300,1016.16 2300,653.78 2309.84,643.94 2325.91,660 2415,660 2415,1045 2395,1065 2355,1025 2300,1025 2300,1016.16
  pour cut-out: 2175,1425 2175.58,1424.42 2281.16,1530 2390,1530 2390,1545 2415,1570 2415,1635 2180,1635 2175,1630
  pour cut-out: 1536.29,679.75 1599.61,679.75 1599.61,670.31 1594.3,665 1575,665 1575,670 1505,740 1450,740 1450,766.05
  pour cut-out: 760,115 2056.16,115 2105,66.16 2105,10 755,10 760,15
  pour cut-out: 2088.91,354.61 2100,343.52 2100,260 2073.76,260 2040.73,226.98 2059.04,208.66 2059.04,140.96 2190,10 2405,10 2405,460 2395,450 2125,450 2125,390.01 2088.55,353.56
  pour cut-out: 2066.12,931.7 2146.69,931.7 2295.69,782.69 2300,787 2300,1016.16 2150.59,1016.16
  pour cut-out: 436.74,1377.43 672.15,1377.43 681.55,1368.03 654.28,1340.77 654.28,1297.02 471.25,1297.02 436.74,1331.54
  pour cut-out: 1980,285 1980,115 2120,115 2125,120 2100,145 2100,281.64 1983.36,281.64
  pour cut-out: 1565,255 1565,159.41 1588.25,136.16 1655,136.16 1655,210 1646.16,210 1601.16,255
  pour cut-out: 1135.49,515 1179.75,470.74 1179.75,418.55 1108.08,418.55 1135.49,445.96

## Silkscreen, mask and mechanical layers (free items; w line width, h text height)
Top Overlay:
  lines w10: 340,1245 340,1025 360,1005 1055,1005
  text ">" at 2025,1478 h40 r180
  text "——" at 2095,1475 h40 r180
  text "(PB15" at 1915,1455 h40
  text "PB0)" at 2110,1455 h40
  text "GND" at 885,1450 h40
  text "(PC15" at 2235,1430 h40 r270
  text "V5" at 880,1335 h40
  text ">" at 2258,1320 h40 r90
  text "——" at 2255,1250 h40 r90
  text "PC0)" at 2235,1235 h40 r270
  text "GND" at 1775,340 h40
  text "SWDIO" at 1860,340 h40
  text "SWCLK" at 1990,340 h40
  text "RST" at 2130,340 h40
  text "V33" at 2200,340 h40
  text "PD2" at 1675,255 h40
  text "TX" at 1480,250 h40
  text "RX" at 1580,250 h40
  text "——" at 1315,160.51 h40 r180
  text "V33" at 595,150 h40
  text "(PA0" at 1150,140 h40
  text "PA15)" at 1345,140 h40
  text ">" at 1310,138.51 h40
  text "GND" at 625,15 h40 r90
Mechanical 1:
  text "外框以keep-out层为准，板厚1.6mm,绿油" at 805,-200 h60

## Text inside footprints (layer, text, board x,y; h text height)
S1: Mechanical 11 "1" at 584.65,1555.34 h25 r180; Mechanical 11 "4" at 384.65,1345.34 h25 r180; Mechanical 11 "6" at 584.65,1345.34 h25 r180; Mechanical 11 "3" at 384.65,1555.34 h25 r180; Mechanical 11 "2" at 484.65,1555.34 h25 r180; Mechanical 11 "5" at 484.65,1345.34 h25 r180